# Altium PCB PCB1.PcbDoc
Units mm, origin at the board's own origin, x right, y up, seen from the top; angles counter-clockwise.
Board outline 100 x 100 mm, 2 copper layers (Top Layer, Bottom Layer); 33 components, 29 nets, 97 pads, 22 vias.
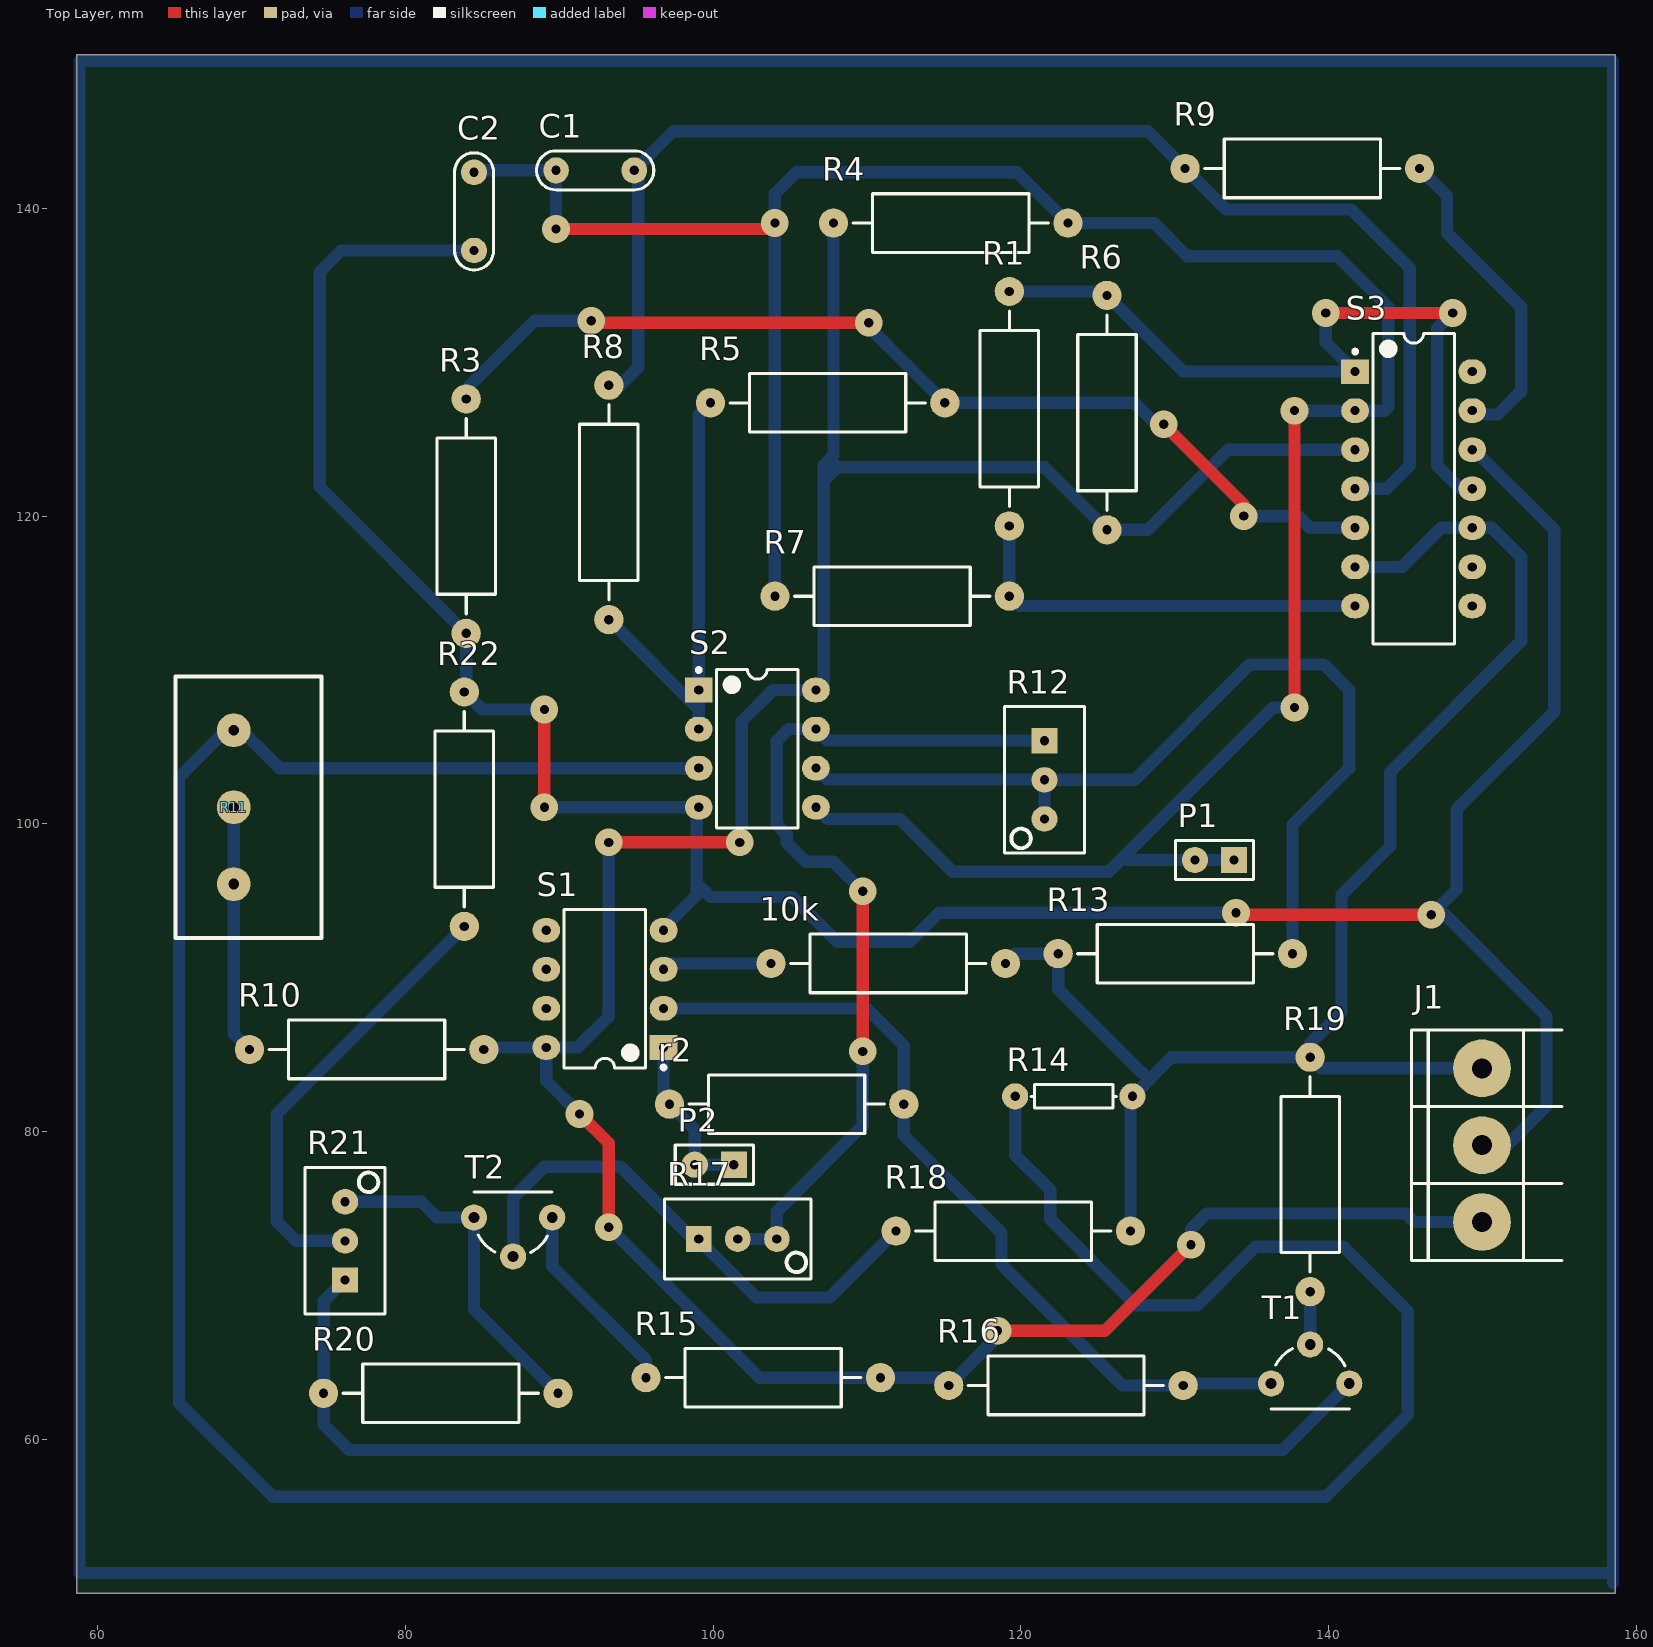
[diagram p0: Top Layer view]
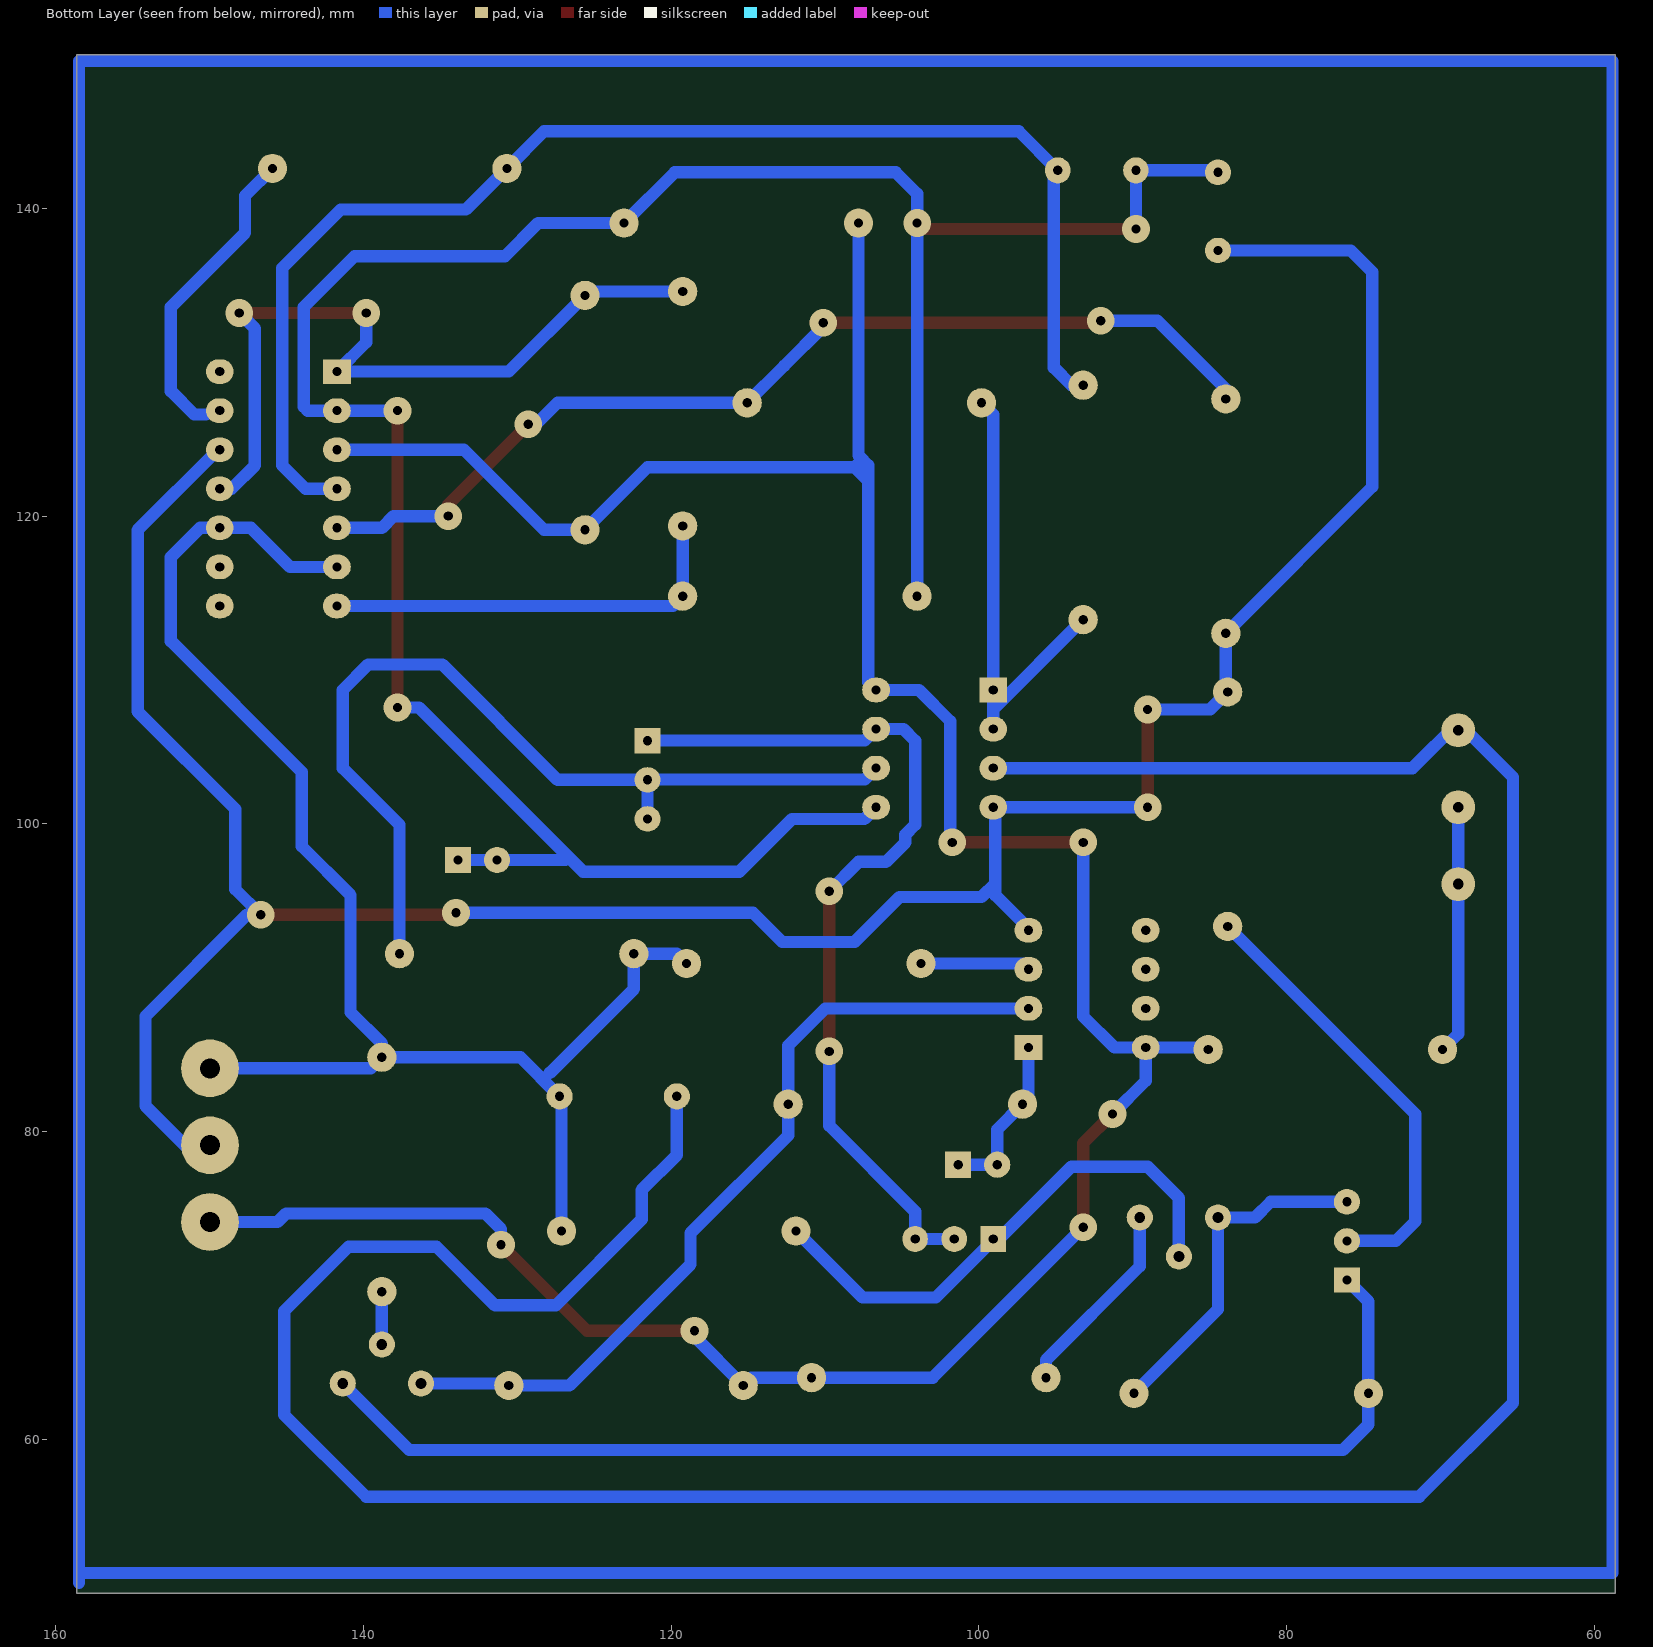
[diagram p1: Bottom Layer view, seen from below]
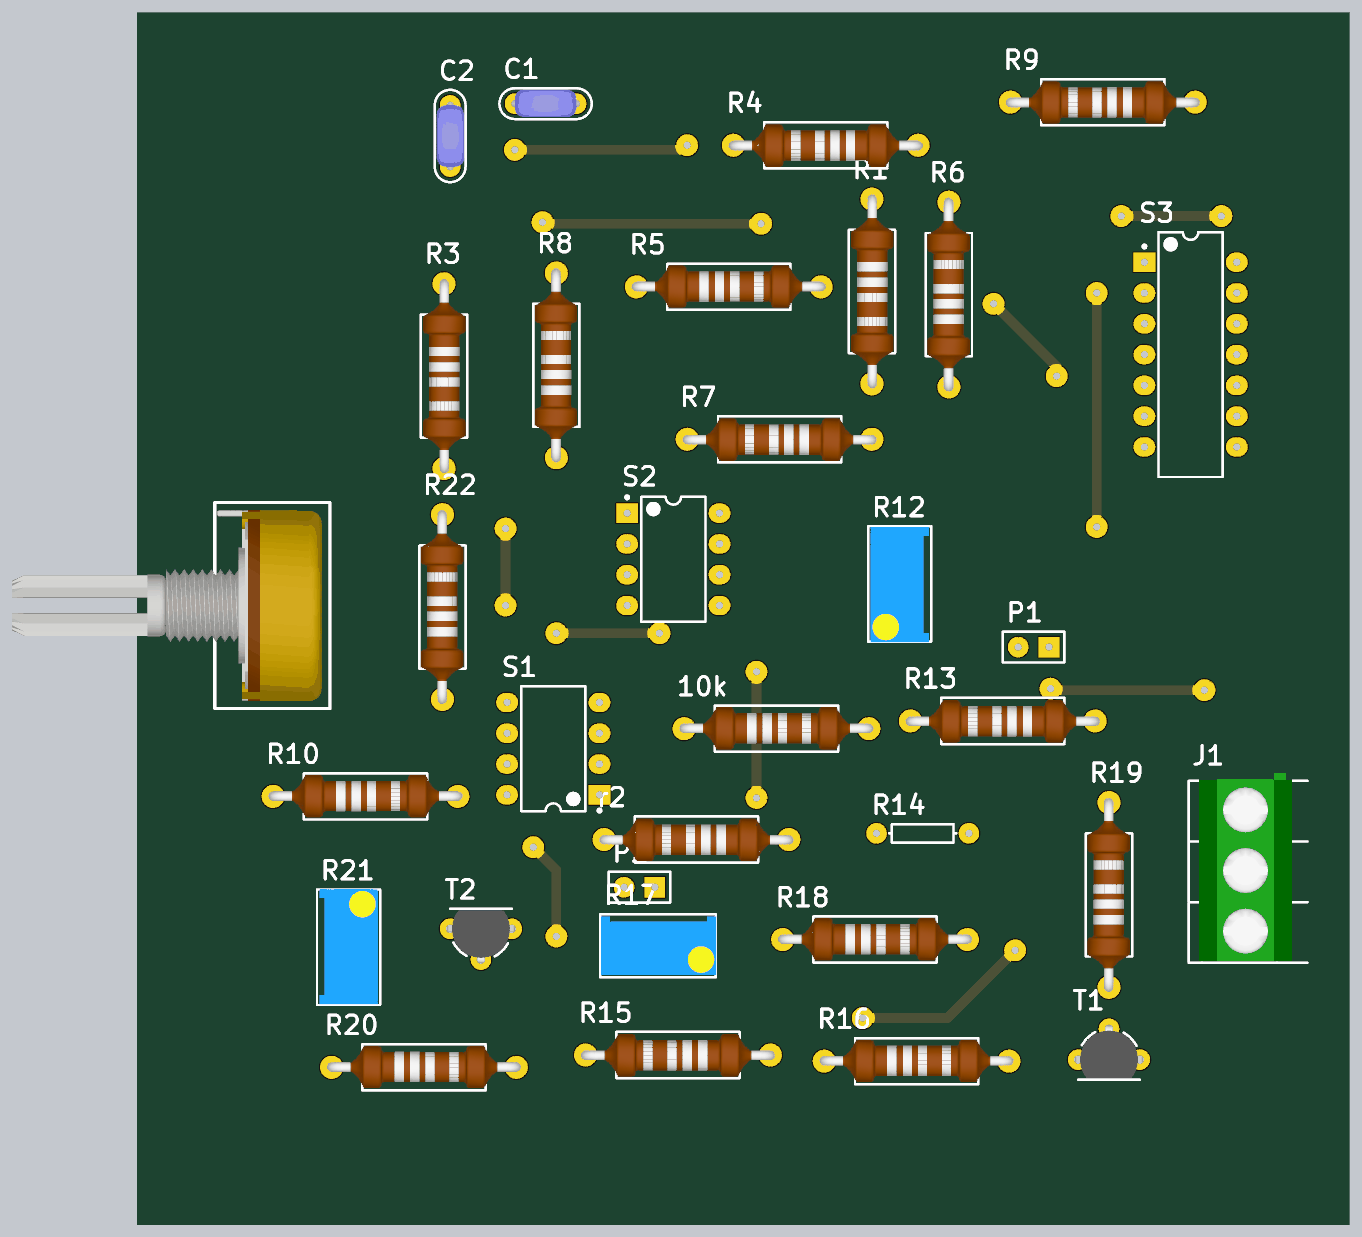
[diagram p2: 3D render of the assembled board from above, using the file's embedded part models]

## Layer stack, top to bottom
Top Layer: signal copper 0.0356
Dielectric: dielectric 0.32, FR-4, Dk 4.8
Bottom Layer: signal copper 0.0356

## Board outline
58.636,50 158.636,50 158.636,150 58.636,150

## Design rules (kind name [scope] priority, off if disabled: settings)
Clearance [All] p1: gap=0.6
PolygonConnect [All] p1: connectstyle=Relief reliefconductorwidth=0.254 reliefentries=4 polygonreliefangle="90 Angle"
RoutingVias [All] p1: holewidth=0.711 width=1.27 viastyle="Through Hole" minholewidth=0.711 minwidth=1.27 maxholewidth=0.711 maxwidth=1.27
SilkscreenOverComponentPads [All] p1: minsilkscreentomaskgap=0.254
SolderMaskExpansion [All] p1: expansion=0.102
Width [All] p1: maxlimit=0.8 minlimit=0.8 preferedwidth=0.8
27 further rules are at their usual default settings.

## Components (designator, comment, footprint, x,y, rotation, side; value= is the part's Value field where it differs from the comment)
10k "10k" RES600 103.759,90.932 r0 top
C1 "1n" CAP200 92.329,142.494 r180 top
C2 "100n" CAP200 84.455,139.827 r90 top
J1 "BORNERA 3" BORNERA3 149.987,79.121 r0 top
P1 "Header 2" HDR1X2 133.858,97.663 r180 top
P2 "Header 2" HDR1X2 101.346,77.851 r180 top
R1 "100k" RES600 119.253,134.62 r270 top
r2 "10k" RES600 112.395,81.788 r180 top
R3 "20k" RES600 83.947,127.635 r270 top
R4 "2k" RES600 123.063,139.065 r180 top
R5 "20k" RES600 99.822,127.381 r0 top
R6 "2k7" RES600 125.603,119.126 r90 top
R7 "10k" RES600 119.253,114.808 r180 top
R8 "100k" RES600 93.218,113.284 r90 top
R9 "50k" RES600 145.923,142.621 r180 top
R10 "3k9" RES600 69.85,85.344 r0 top
R11 "POTENCIOMETRO" POTENCIOMETRO 68.834,101.092 r270 top
R12 "20k" "PRESET V" 121.539,102.87 r270 top
R13 "1k" RES600 137.668,91.567 r180 top
R14 "Res1" AXIAL-0.3 123.444,82.296 r180 top
R15 "10k" RES600 110.871,64.008 r180 top
R16 "10k" RES600 115.316,63.5 r0 top
R17 "100k" "PRESET V" 101.6,73.025 r0 top
R18 "2.2k" RES600 111.887,73.533 r0 top
R19 "2.2k" RES600 138.811,69.596 r90 top
R20 "390" RES600 74.676,62.992 r0 top
R21 "50k" "PRESET V" 76.073,72.898 r90 top
R22 "1.8k" RES600 83.82,93.345 r90 top
S1 "SW-DIP4" DIP-8 92.964,89.281 r180 top
S2 "SW-DIP4" DIP-8 102.87,104.902 r0 top
S3 "SW DIP-7" DIP-14 145.542,121.793 r0 top
T1 "TRANSISTOR NPN" TO92 138.811,64.897 r180 top
T2 "TRANSISTOR NPN" TO92 86.995,73.152 r0 top

## Footprints (in the part's own frame and the unit in brackets; to place one, negate y for a bottom-side part, rotate by r counter-clockwise, add the part's x,y. Pads: shape width x height; smd on the part's side, far side on the other; paste and mask are expansions set on the pad)
AXIAL-0.3 [mm] "Axial Device, Thru-Hole; 2 Leads; 0.3 in Pin Spacing"
  round 1.7 hole 0.6: 1(-3.81,0) 2(3.81,0)
  silkscreen extent -2.77,-0.76 2.77,0.76
BORNERA3 [mm] "Bornera con Tornillos 5mm separación"
  round 3.75 hole 1.3: 1(0,5) 2(0,0) 3(0,-5)
  silkscreen extent -4.6,-7.5 5.2,7.5, body extent -3.76,-7.39 3.94,8.11, height 10.05
CAP200 [mm]
  oval 1.65x1.7 hole 0.6: 1(-2.54,0) 2(2.54,0)
  silkscreen extent -3.81,-1.27 3.81,1.27, body extent -2.79,-1.17 2.79,1.12, height 6.24
DIP-8 [mm] "DIP; 8 Leads; Row Spacing 7.62 mm; Pitch 2.54 mm"
  rect 1.8x1.6 hole 0.6: 1(-3.81,3.81)
  oval 1.8x1.6 hole 0.6: 2(-3.81,1.27) 3(-3.81,-1.27) 4(-3.81,-3.81) 5(3.81,-3.81) 6(3.81,-1.27) 7(3.81,1.27) 8(3.81,3.81)
  silkscreen extent -3.94,-5.15 2.65,5.23, body extent -3.6,-5.15 3.6,5.15, height 5.08
DIP-14 [mm] "DIP; 14 Leads; Row Spacing 7.62 mm; Pitch 2.54 mm"
  rect 1.8x1.6 hole 0.6: 1(-3.81,7.62)
  oval 1.8x1.6 hole 0.6: 2(-3.81,5.08) 3(-3.81,2.54) 4(-3.81,0) 5(-3.81,-2.54) 6(-3.81,-5.08) 7(-3.81,-7.62) 8(3.81,-7.62) 9(3.81,-5.08) 10(3.81,-2.54) 11(3.81,0) 12(3.81,2.54) 13(3.81,5.08) 14(3.81,7.62)
  silkscreen extent -3.93,-10.1 2.65,10.1, body extent -3.6,-10.1 3.6,10.1, height 5.08
HDR1X2 [mm] "Connector; Header; 2 Position"
  rect 1.7x1.7 hole 0.6: 1(0,0)
  round 1.7 hole 0.6: 2(2.54,0)
  silkscreen extent -1.27,-1.27 3.81,1.27
POTENCIOMETRO [mm]
  round 2.2 hole 0.7: 1(-5,0) 2(0,0) 3(5,0)
  silkscreen extent -8.5,-3.8 8.5,5.7, body extent -7.87,-20.53 7.87,5.03, height 20.12
"PRESET V" [mm]
  rect 1.65x1.7 hole 0.6: 1(-2.54,0)
  oval 1.65x1.7 hole 0.6: 2(0,0) 3(2.54,0)
  silkscreen extent -4.76,-2.6 4.76,2.6, body extent -4.7,-2.42 4.83,2.42, height 11.55
RES600 [mm]
  round 1.9 hole 0.6: 1(0,0) 2(15.24,0)
  silkscreen extent 1.27,-1.91 13.97,1.91, body extent -0.4,-1.72 15.64,1.78, height 3.59
TO92 [mm]
  round 1.7 hole 0.7: 1(0,-1.27) 2(2.54,1.27) 3(-2.54,1.27)
  silkscreen extent -2.54,-1 2.54,2.92, body extent -2.79,-1.55 2.79,2.79, height 8

## Part data
10k R1 r2 R3 R4 R5 R6 R7 R8 R9 R10 R13 R15 R16 R18 R19 R20 R22: library part RES
C1 C2: library part CAP
P1 P2: "Header, 2-Pin"
R12 R17 R21: library part PRESET
R14: "Resistor"
S1 S2: "DIP Switch"
S3: "DIP Switch, 7 Position, SPST"

## Via types
v1: diameter 1.8, hole 0.6, Top Layer to Bottom Layer, 22 vias

## Nets (pads, with @x,y where several pads share a name; then routed paths per layer and width w, separated by ;. In a path a pad name is that pad's centre, name@x,y a point inside that pad or via, vN(x,y) a via of type N, cw(c..) or ccw(c..) an arc to the next point about the centre after c; other vN are vias at no path point)
1IN+: R1.2 R7.1 S3.7 | length 27.3
  Bottom Layer w0.8: R1.2 R7.1 119.888,114.173 S3.7
1IN-: 10k.2 J1.1 R13.2 R14.1 R18.2 R19.2 S3.6 S3.10 | length 97.2
  Bottom Layer w0.8: 10k.2 119.634,91.567 R13.2 122.428,89.281 127.889,83.82 ; R18.2 R14.1@127.127,82.169 ; R14.1 129.794,84.836 R19.2 ; S3.6 144.78,116.713 147.32,119.253 S3.10 150.622,119.253 152.527,117.348 152.527,111.887 144.018,103.378 144.018,98.552 140.843,95.377 140.843,87.757 138.811,85.725 R19.2 ; J1.1 139.526,84.121 R19.2
2IN+: R3.1 R5.2 S3.5 | length 66.9
  Top Layer w0.8: v1(92.075,132.715) 92.202,132.588 v1(110.109,132.588) v1@110.617,132.588 ; v1(129.286,125.984) 134.493,120.777 v1(134.493,120.015)
  Bottom Layer w0.8: R3.1 83.947,128.27 88.392,132.715 v1(92.075,132.715) ; v1(110.109,132.588) 110.109,132.334 112.649,129.794 R5.2 127.381,127.381 128.778,125.984 v1(129.286,125.984) ; v1(134.493,120.015) 138.049,120.015 138.811,119.253 S3.5
2IN-: C1.1 R8.2 R9.2 S3.4 | length 87.5
  Bottom Layer w0.8: R8.2 93.98,128.524 95.123,129.667 95.123,142.24 C1.1 97.409,145.034 128.27,145.034 R9.2 133.35,139.954 141.478,139.954 145.288,136.144 145.288,123.317 143.764,121.793 S3.4
3IN+: S3.9
3IN-: S3.8
4IN+: R1.1 R6.2 S3.1 S3.11 | length 50.7
  Top Layer w0.8: v1(139.827,133.223) v1(148.082,133.223)
  Bottom Layer w0.8: R1.1 125.349,134.62 R6.2 130.556,129.413 S3.1 139.827,131.318 v1(139.827,133.223) ; v1(148.082,133.223) 147.066,132.207 147.066,123.317 148.59,121.793 S3.11
NetR10_1: R10.1 R11.2 R11.3 | length 16.7
  Bottom Layer w0.8: R11.2@68.834,101.6 68.834,96.6 68.834,86.36 R10.1
NetR15_2: R15.2 T2.2 | length 12.9
  Bottom Layer w0.8: T2.2 89.535,71.247 95.631,65.151 R15.2
NetR17_1: R17.1 R18.1 T2.1 | length 34.9
  Bottom Layer w0.8: T2.1 86.995,75.692 89.027,77.724 93.98,77.724 98.679,73.025 R17.1 99.06,72.959 102.804,69.215 107.569,69.215 R18.1
NetR19_1: R19.1 T1.1 | length 3.4
  Bottom Layer w0.8: T1.1 R19.1
NetR20_1: R20.1 R21.1 T1.3 | length 79.1
  Bottom Layer w0.8: R21.1 74.676,68.961 R20.1 74.676,60.96 76.327,59.309 137.033,59.309 T1.3
NetR20_2: R20.2 R21.3 T2.3 | length 22.5
  Bottom Layer w0.8: R21.3 81.026,75.438 82.042,74.422 T2.3 84.455,68.453 R20.2
NetR21_2: R21.2 R22.1 | length 29.2
  Bottom Layer w0.8: R21.2 72.898,72.898 71.628,74.168 71.628,81.153 R22.1
OUT2: C1.2 C2.2 P1.1 P1.2 R4.1 R7.2 S2.5 S3.2 | length 170.3
  Top Layer w0.8: v1(89.789,138.684) 104.013,138.684 v1(104.013,139.065) ; v1(137.795,107.569) v1(137.795,126.873)
  Bottom Layer w0.8: C2.2 84.582,142.494 C1.2 v1(89.789,138.684) ; R7.2 104.013,140.97 105.41,142.367 119.761,142.367 R4.1 128.651,139.065 130.81,136.906 140.589,136.906 143.888,133.607 143.888,127.124 143.637,126.873 S3.2 v1@138.049,126.873 ; S2.5 107.442,100.33 112.141,100.33 115.57,96.901 125.73,96.901 126.682,97.853 ; P1.1 P1.2 126.873,97.663 126.682,97.853 ; v1(137.795,107.569) 136.398,107.569 126.682,97.853
OUT3: S3.14
OUT4: R9.1 S3.13 | length 20.1
  Bottom Layer w0.8: R9.1 147.701,140.843 147.701,138.43 152.527,133.604 152.527,128.143 151.003,126.619 150.241,126.619
TL2IN1+: 10k.1 S1.3 | length 7.1
  Bottom Layer w0.8: S1.3 97.155,90.932 10k.1
TL2IN1-: r2.1 R16.2 S1.2 T1.2 | length 54.3
  Bottom Layer w0.8: S1.2 109.982,88.011 112.395,85.598 r2.1 112.395,79.756 118.745,73.406 118.745,71.374 126.619,63.5 R16.2 130.683,63.627 T1.2
TL2IN2+: S1.5
TL2IN2-: S1.6
TL2OUT1: P2.1 P2.2 r2.2 S1.1 | length 11
  Bottom Layer w0.8: S1.1 96.774,82.169 r2.2 98.806,80.137 P2.2 P2.1
TL2OUT2: S1.7
TLIN1+: R11.1 R14.2 S2.3 | length 206.3
  Bottom Layer w0.8: S2.3 71.802,103.632 68.834,106.6 65.278,103.044 65.278,62.357 71.374,56.261 139.827,56.261 145.161,61.595 145.161,68.326 140.97,72.517 135.255,72.517 131.445,68.707 127.508,68.707 121.92,74.295 121.92,76.2 119.634,78.486 R14.2
TLIN1-: R5.1 R8.1 S2.1 S2.2 | length 29.8
  Bottom Layer w0.8: R8.1 99.06,107.442 ; S2.2 99.06,107.442 ; R5.1 99.06,126.619 S2.1 99.06,107.442
TLIN2-: R12.2 R12.3 R13.1 S2.6 | length 60
  Bottom Layer w0.8: S2.6 107.42,102.892 121.517,102.892 R12.2 ; R12.3 R12.2 ; R13.1 137.668,99.949 141.351,103.632 141.351,108.712 139.7,110.363 134.874,110.363 127.381,102.87 R12.2
TLOUT2: R12.1 R17.2 R17.3 S2.7 | length 58.6
  Top Layer w0.8: v1(109.728,85.217) v1(109.728,95.631)
  Bottom Layer w0.8: R17.2 R17.3 104.14,74.803 109.728,80.391 v1(109.728,85.217) ; v1(109.728,95.631) 107.823,97.536 106.045,97.536 104.775,98.806 104.775,99.314 104.14,99.949 104.14,105.41 104.902,106.172 S2.7 107.42,105.432 121.517,105.432 R12.1
VCC: J1.3 R4.2 R6.1 R10.2 R15.1 R16.1 S1.8 S2.8 S3.3 | length 195.4
  Top Layer w0.8: v1(91.313,81.153) 93.218,79.248 v1(93.218,73.787) ; v1(93.218,98.806) v1(101.727,98.806) ; S2.8@106.574,108.712 S2.8 ; v1(118.491,67.056) 125.476,67.056 v1(131.064,72.644)
  Bottom Layer w0.8: R10.2 85.217,85.471 S1.8 ; v1(91.313,81.153) 89.154,83.312 S1.8 ; v1(93.218,73.787) 102.997,64.008 R15.1 114.808,64.008 R16.1 118.491,66.675 v1(118.491,67.056) ; v1(93.218,98.806) 93.218,87.503 91.186,85.471 S1.8 ; v1@101.854,98.933 v1@101.854,99.568 ; 101.854,100.076 v1@101.854,99.568 ; R4.2 107.823,123.952 107.696,123.825 ; v1(131.064,72.644) 131.064,73.66 132.08,74.676 145.034,74.676 145.589,74.121 J1.3 ; S3.3 133.477,124.333 128.27,119.126 R6.1 121.539,123.19 108.077,123.19 ; v1@101.854,99.568 101.854,106.68 103.886,108.712 S2.8 107.188,109.22 107.188,122.301 ; 107.188,122.301 107.188,123.317 107.696,123.825 ; 107.188,122.301 107.315,122.428 ; 107.315,122.428 107.315,123.19 107.696,122.809 ; 107.315,122.428 107.696,122.809 ; 107.696,122.809 107.696,123.571 ; 107.696,122.809 108.077,123.19 ; 107.696,123.571 107.696,123.825 ; 107.696,123.571 108.077,123.19
VEE: C2.1 J1.2 R3.2 R22.2 S1.4 S2.4 S3.12 | length 180.2
  Top Layer w0.8: v1(89.027,101.092) v1(89.027,107.442) ; v1@133.985,94.107 v1(146.685,94.107)
  Bottom Layer w0.8: C2.1 75.819,137.287 74.422,135.89 74.422,121.92 R3.2 83.947,108.712 R22.2 84.963,107.442 v1(89.027,107.442) ; v1(89.027,101.092) S2.4 98.933,100.965 98.933,95.377 96.774,93.218 S1.4 ; 98.933,96.139 99.822,95.25 105.156,95.25 108.077,92.329 112.776,92.329 114.681,94.234 v1(133.985,94.234) ; S3.12 149.458,124.333 154.686,119.105 154.686,107.315 148.336,100.965 148.336,95.758 v1(146.685,94.107) 147.574,94.107 154.178,87.503 154.178,81.661 151.638,79.121 J1.2
copper on no net: | length 396.2
  Bottom Layer w0.8: 158.115,51.308 58.801,51.308 58.801,149.606 158.496,149.606 158.496,50.673